# EAGLE board untitled (EAGLE 5.07)
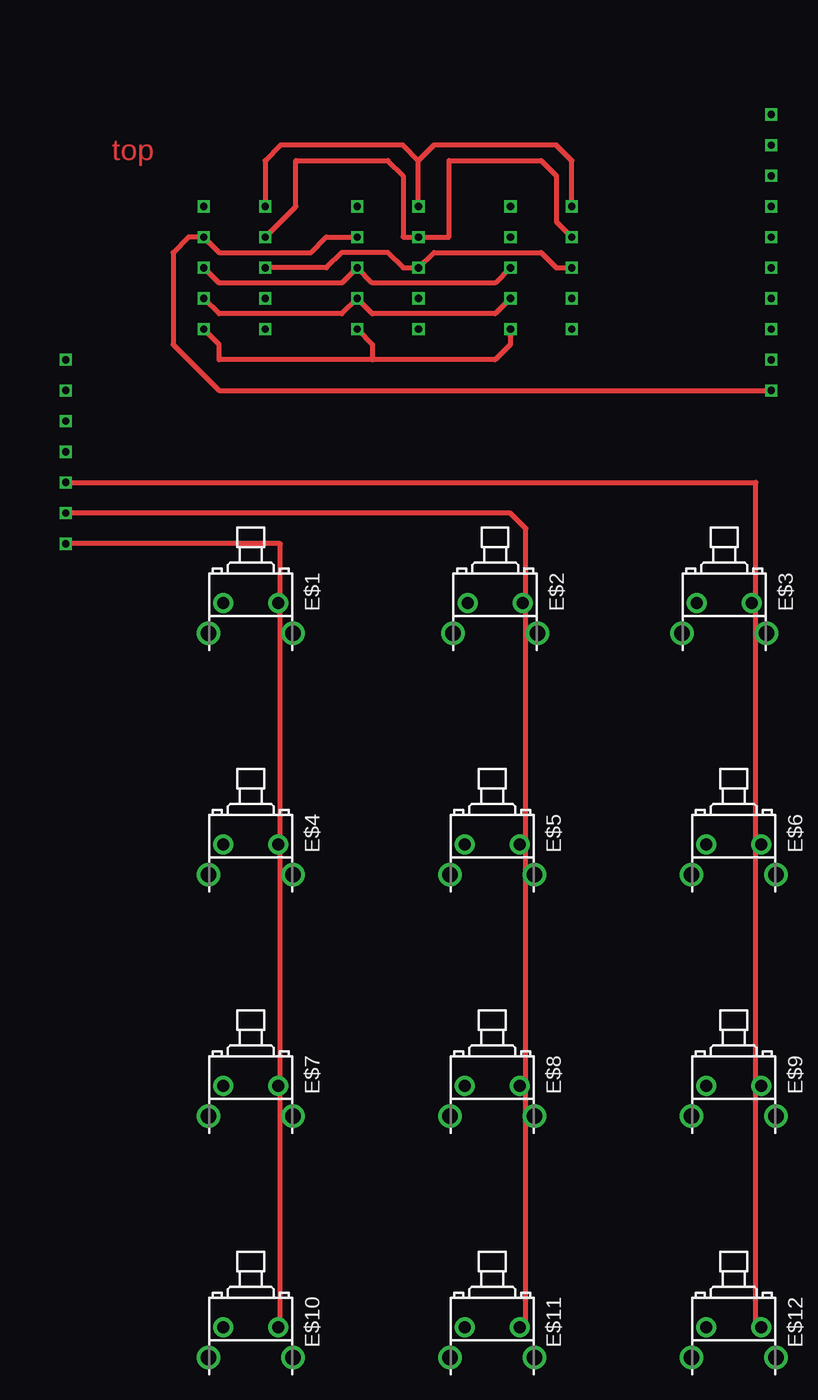
[diagram p0: board, top side]
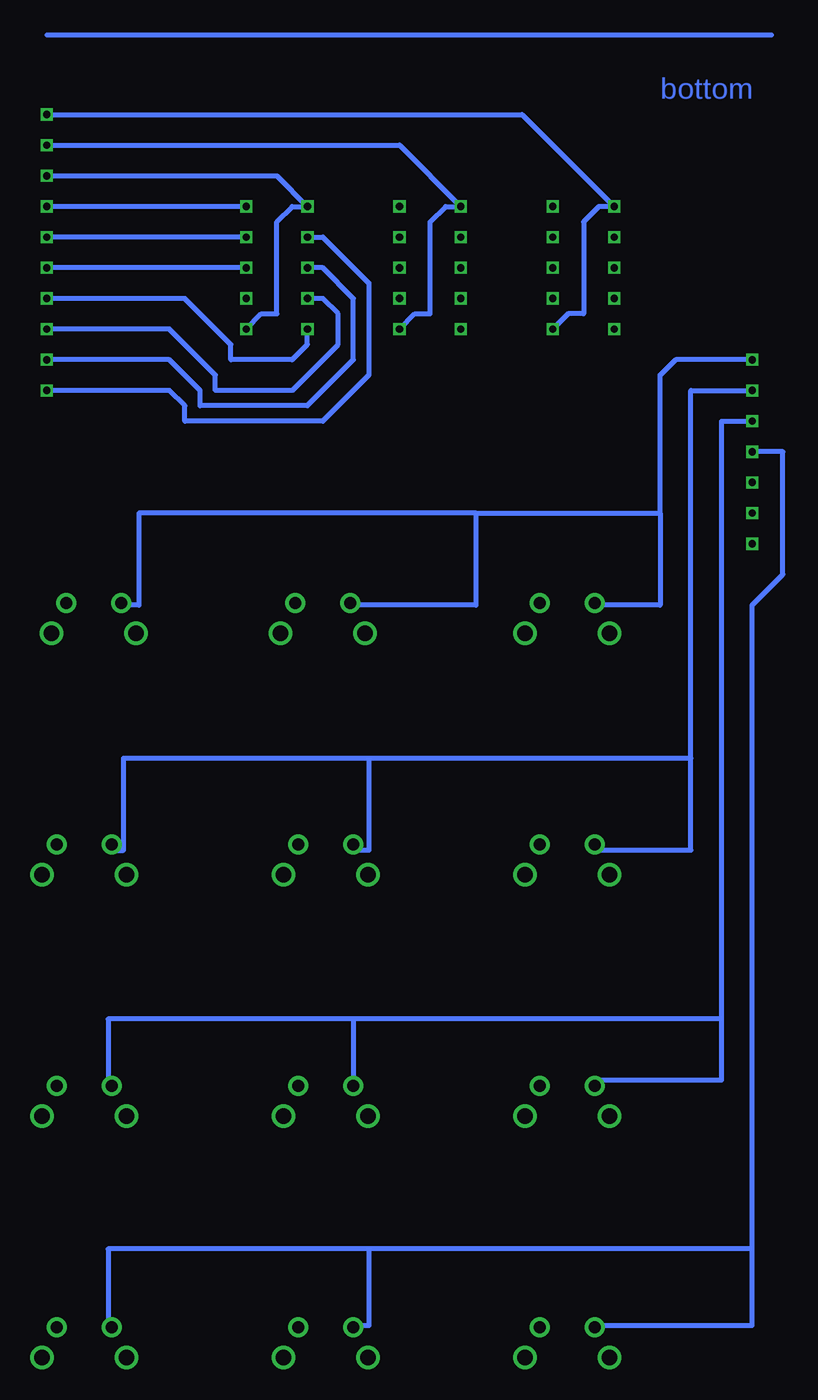
[diagram p1: board, bottom side, seen from below]

No outline drawn. Coordinates in mm, seen from the top.
Copper layers (1*16): Top 0.035mm / dielectric 1.5mm / Bottom 0.035mm
Design rules "default *": minimum track width 20mil, minimum drill 24mil, track to track 8mil, track to pad 8mil, pad to pad 8mil, via to via 8mil, smd to smd 8mil, copper to edge 40mil, drill to drill 8mil, minimum pad ring 10mil, minimum via ring 8mil, stop-mask expansion 4mil, vias tented up to drill 0mil, thermal gap 10mil

## Footprints (pad centres in the part's own frame; a part is rotated, then mirrored left to right if it is on the bottom)
TL1105J = drill 1 pad 1.676 round: 1 -2.275,0; 2 2.275,0 | drill 1.3 pad 1.9 round: 3 -3.5,2.5; 4 3.5,2.5

## Placement (x,y rotation side)
E$1  [TL1105J]  36.91,39.53 180 top
E$2  [TL1105J]  57.15,39.53 180 top
E$3  [TL1105J]  76.12,39.53 180 top
E$4  [TL1105J]  36.91,19.53 180 top
E$5  [TL1105J]  56.91,19.53 180 top
E$6  [TL1105J]  76.91,19.53 180 top
E$7  [TL1105J]  36.91,-0.47 180 top
E$8  [TL1105J]  56.91,-0.47 180 top
E$9  [TL1105J]  76.91,-0.47 180 top
E$10  [TL1105J]  36.91,-20.47 180 top
E$11  [TL1105J]  56.91,-20.47 180 top
E$12  [TL1105J]  76.91,-20.47 180 top

## Library data of the parts
E$1-E$12 = switch

## Tracks (layer width: path | path; a pad name or v marks a point on that pad's centre or on a via)
S$1
  Bottom 0.406: 20,86.59 80,86.59
S$3  (via drill 0.6)
  other vias: 63.5,64.77
S$4  (via drill 0.6)
  Top 0.406: v63.5,67.31 62.23,67.31 60.96,68.58 52.07,68.58 v50.8,67.31 49.53,67.31 48.26,68.58 44.45,68.58 43.18,67.31 v38.1,67.31
  Bottom 0.406: v63.5,67.31 v80.01,67.31
S$5  (via drill 0.6)
  Top 0.406: v63.5,69.85 62.23,71.12 62.23,74.93 60.96,76.2 53.34,76.2 53.34,69.85 v50.8,69.85 49.53,69.85 49.53,74.93 48.26,76.2 40.64,76.2 40.64,72.39 v38.1,69.85
  Bottom 0.406: v63.5,69.85 v80.01,69.85
S$6  (via drill 0.6)
  Bottom 0.406: v38.1,62.23 36.83,63.5 35.56,63.5 35.56,71.12 34.29,72.39 v33.02,72.39 40.64,80.01 v80.01,80.01
S$7  (via drill 0.6)
  Top 0.406: 39.37,-20.32 39.37,44.45 v21.59,44.45
S$8  (via drill 0.6)
  Bottom 0.406: v50.8,62.23 49.53,63.5 48.26,63.5 48.26,71.12 46.99,72.39 v45.72,72.39 50.8,77.47 v80.01,77.47
S$10  (via drill 0.6)
  Top 0.406: v58.42,67.31 57.15,66.04 46.99,66.04 v45.72,67.31 44.45,66.04 34.29,66.04 v33.02,67.31
  Bottom 0.406: v80.01,59.69 69.85,59.69 67.31,57.15 67.31,55.88 58.42,55.88 54.61,59.69 54.61,64.77 57.15,67.31 v58.42,67.31
S$11  (via drill 0.6)
  Top 0.406: v58.42,64.77 57.15,63.5 46.99,63.5 v45.72,64.77 44.45,63.5 34.29,63.5 v33.02,64.77
  Bottom 0.406: v80.01,62.23 69.85,62.23 66.04,58.42 66.04,57.15 59.69,57.15 55.88,60.96 55.88,63.5 57.15,64.77 v58.42,64.77
S$12  (via drill 0.6)
  Top 0.406: v58.42,62.23 58.42,60.96 57.15,59.69 46.99,59.69 | v45.72,62.23 46.99,60.96 46.99,59.69 | 46.99,59.69 34.29,59.69 34.29,60.96 v33.02,62.23
  Bottom 0.406: v80.01,64.77 68.58,64.77 64.77,60.96 64.77,59.69 59.69,59.69 58.42,60.96 v58.42,62.23
S$14  (via drill 0.6)
  other vias: 50.8,64.77
S$21  (via drill 0.6)
  Top 0.406: v45.72,69.85 43.18,69.85 41.91,68.58 34.29,68.58 v33.02,69.85 31.75,69.85 30.48,68.58 30.48,60.96 34.29,57.15 v80.01,57.15
  Bottom 0.406: v58.42,69.85 57.15,69.85 53.34,66.04 53.34,58.42 57.15,54.61 68.58,54.61 68.58,55.88 69.85,57.15 v80.01,57.15
S$24  (via drill 0.6)
  other vias: 38.1,64.77
S$27  (via drill 0.6)
  Top 0.406: v63.5,72.39 63.5,76.2 62.23,77.47 52.07,77.47 50.8,76.2 | v50.8,72.39 50.8,76.2 | 50.8,76.2 49.53,77.47 39.37,77.47 38.1,76.2 v38.1,72.39
  Bottom 0.406: v63.5,72.39 v80.01,72.39
S$33  (via drill 0.6)
  Top 0.406: 59.69,-20.32 59.69,45.72 58.42,46.99 v21.59,46.99
S$34  (via drill 0.6)
  Bottom 0.406: 73.66,39.37 72.39,39.37 72.39,46.99 44.45,46.99 | 54.61,39.37 44.45,39.37 44.45,46.99 | 44.45,46.99 29.21,46.99 | 34.29,39.37 29.21,39.37 29.21,46.99 | 29.21,46.99 29.21,58.42 27.94,59.69 v21.59,59.69
S$35  (via drill 0.6)
  Bottom 0.406: 74.93,19.05 73.66,19.05 73.66,26.67 53.34,26.67 | 54.61,19.05 53.34,19.05 53.34,26.67 | 34.29,19.05 26.67,19.05 26.67,26.67 | 26.67,26.67 53.34,26.67 | 26.67,26.67 26.67,57.15 v21.59,57.15
S$36  (via drill 0.6)
  Top 0.406: 78.74,-20.32 78.74,49.53 v21.59,49.53
S$37  (via drill 0.6)
  Bottom 0.406: 74.93,0 74.93,5.08 54.61,5.08 | 54.61,5.08 54.61,0 | 24.13,5.08 54.61,5.08 | 34.29,0 24.13,0 24.13,5.08 | 24.13,5.08 24.13,54.61 v21.59,54.61
S$40  (via drill 0.6)
  Bottom 0.406: 74.93,-20.32 74.93,-13.97 53.34,-13.97 | 54.61,-20.32 53.34,-20.32 53.34,-13.97 | 21.59,-13.97 53.34,-13.97 | 34.29,-20.32 21.59,-20.32 21.59,-13.97 | 21.59,-13.97 21.59,39.37 19.05,41.91 19.05,52.07 v21.59,52.07
S$42  (via drill 0.6)
  Bottom 0.406: v63.5,62.23 62.23,63.5 60.96,63.5 60.96,71.12 59.69,72.39 v58.42,72.39 60.96,74.93 v80.01,74.93

## Text on the board
Top: top
Bottom: bottom